# Altium PCB PCB.PcbDoc
Units mil, origin at the board's own origin, x right, y up, seen from the top; angles counter-clockwise.
Board outline 6000 x 4000 mil, 2 copper layers (Top Layer, Bottom Layer); 8 components, 3 nets, 32 pads, 0 vias.
Unrouted connection lines stored in the file: 14.
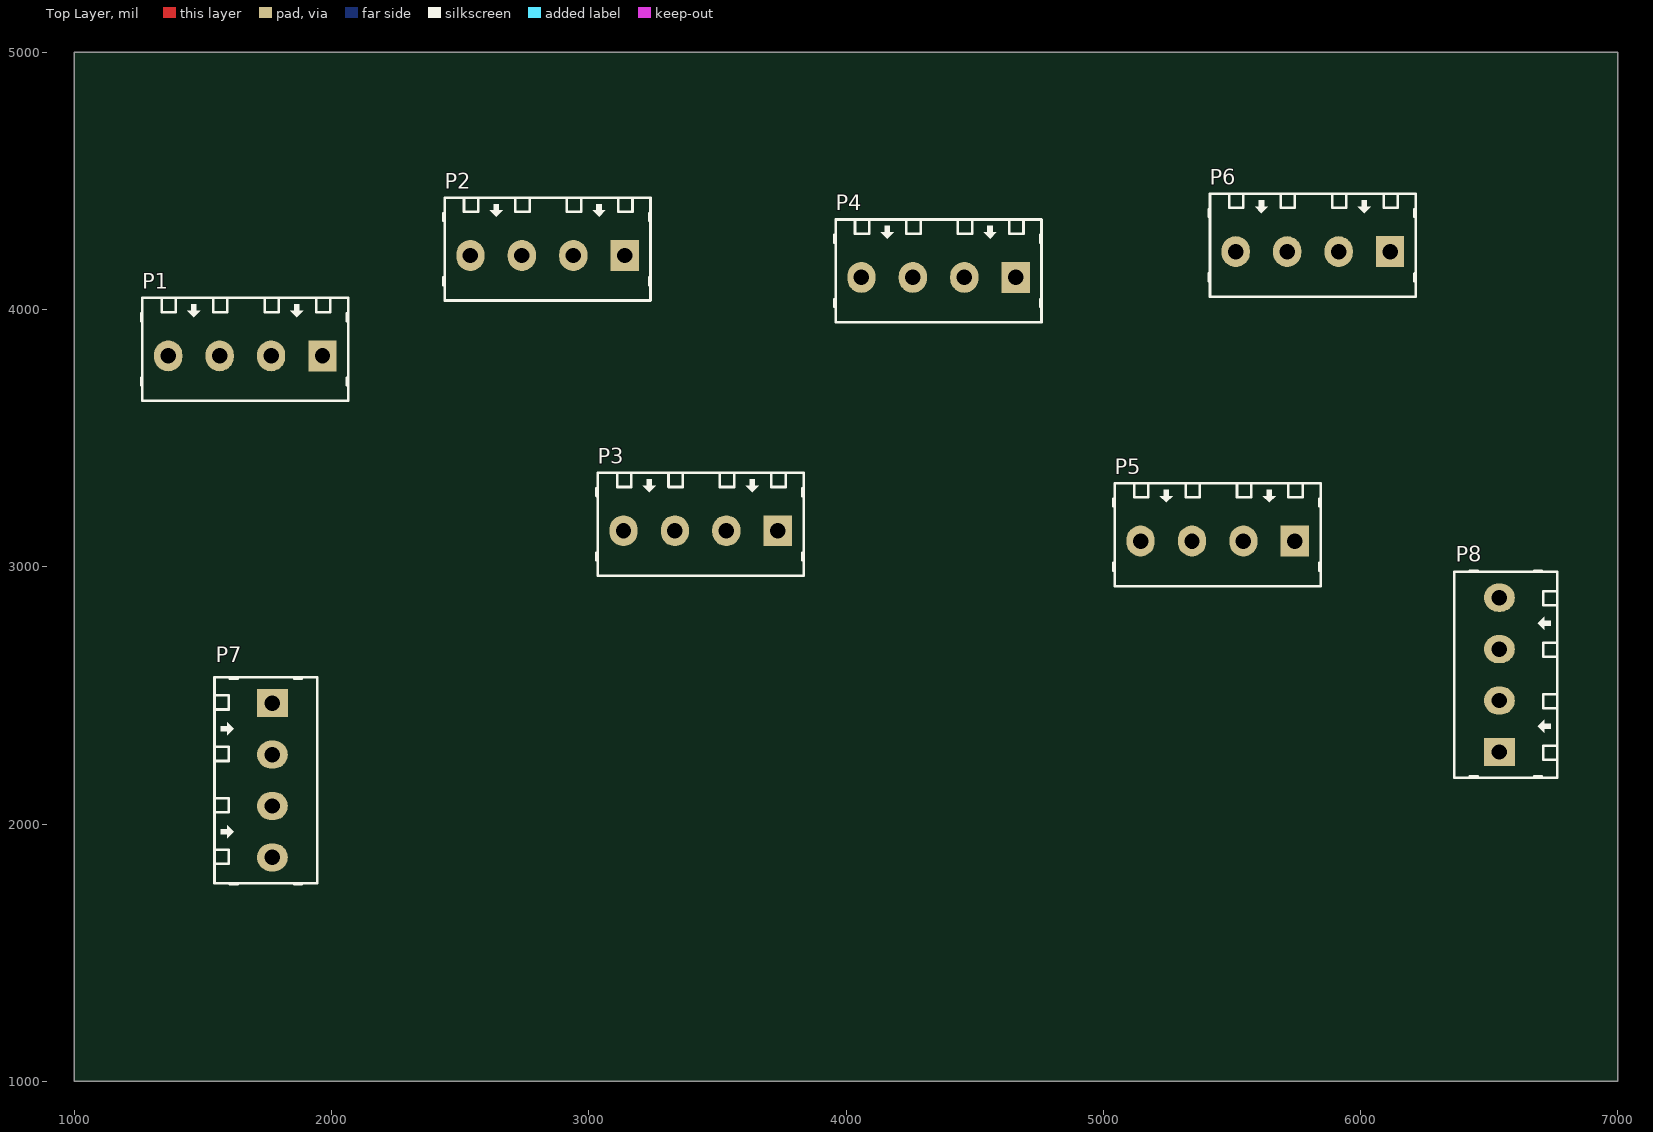
[diagram p0: Top Layer view]
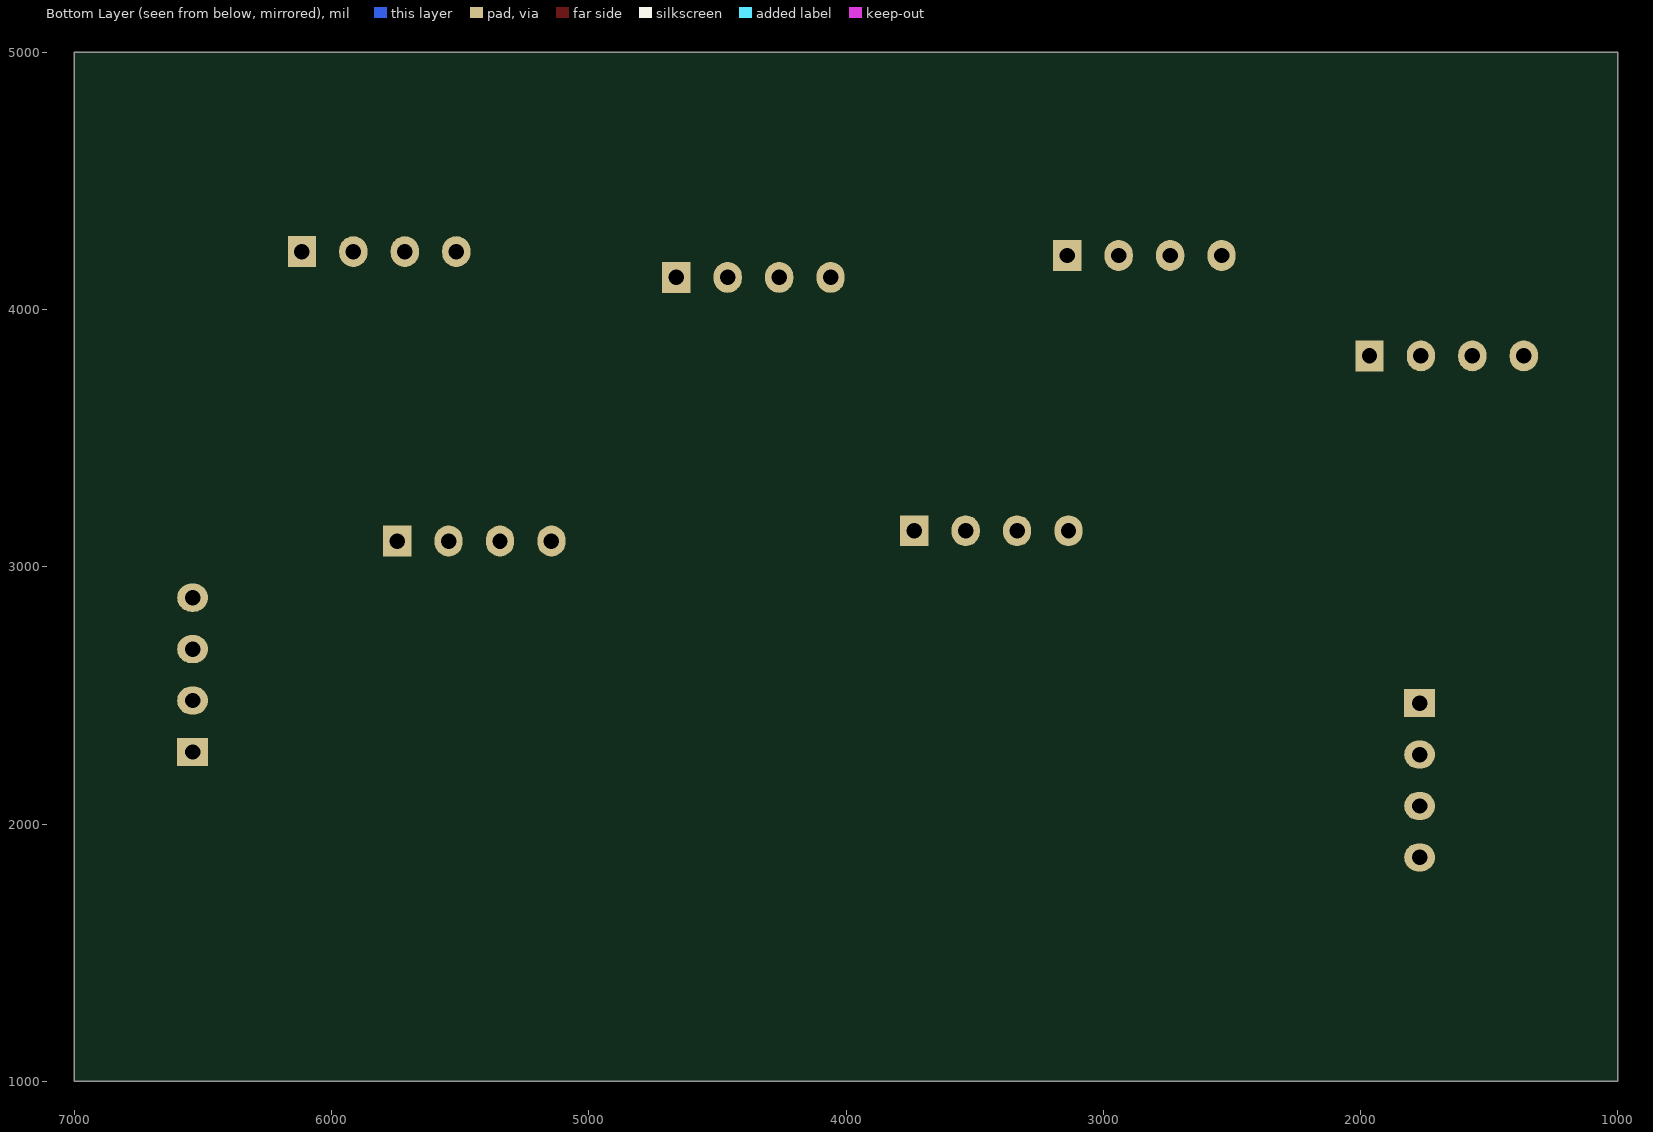
[diagram p1: Bottom Layer view, seen from below]

## Layer stack, top to bottom
Top Solder: solder mask 0.4, Solder Resist, Dk 3.5
Top Layer: signal copper 1.4
Dielectric 1: dielectric 12.6, FR-4, Dk 4.8
Bottom Layer: signal copper 1.4
Bottom Solder: solder mask 0.4, Solder Resist, Dk 3.5

## Board outline
1000,1000 7000,1000 7000,5000 1000,5000

## Design rules (kind name [scope] priority, off if disabled: settings)
Clearance [All] p1: gap=787.4 ignorepadtopadclearanceinfootprint=FALSE
PolygonConnect [All] p1: connectstyle=Relief reliefconductorwidth=10 reliefentries=4 polygonreliefangle="90 Angle" airgapwidth=10
RoutingVias [All] p1: holewidth=28 width=50 viastyle="Through Hole" minholewidth=28 minwidth=50 maxholewidth=28 maxwidth=50
SolderMaskExpansion [All] p1: expansion=4 istentingtop=FALSE
Width [All] p1: maxlimit=100 minlimit=10 preferedwidth=40 toplayer_minwidth=20 minimp=50.000000 maximp=50.000000 favimp=50.000000
30 further rules are at their usual default settings.

## Components (designator, comment, footprint, x,y, rotation, side; value= is the part's Value field where it differs from the comment)
P1 "Header 4" HDR/Terminal/4 1665,3820 r180 top
P2 "Header 4" HDR/Terminal/4 2840,4210 r180 top
P3 "Header 4" HDR/Terminal/4 3435,3140 r180 top
P4 "Header 4" HDR/Terminal/4 4360,4125 r180 top
P5 "Header 4" HDR/Terminal/4 5445,3100 r180 top
P6 "Header 4" HDR/Terminal/4 5815,4225 r180 top
P7 "Header 4" HDR/Terminal/4 1770,2170 r270 top
P8 "Header 4" HDR/Terminal/4 6540,2580 r90 top

## Footprints (in the part's own frame and the unit in brackets; to place one, negate y for a bottom-side part, rotate by r counter-clockwise, add the part's x,y. Pads: shape width x height; smd on the part's side, far side on the other; paste and mask are expansions set on the pad)
HDR/Terminal/4 [mil]
  rect 110x120 hole 60: 1(-300,0)
  oval 110x120 hole 60: 2(-100,0) 3(100,0) 4(300,0)
  silkscreen extent -400,-225 405,175, body extent -429,-218 400,168, height 559

## Part data
P1 P2 P3 P4 P5 P6 P7 P8: "Header, 4-Pin"

## Nets (pads, with @x,y where several pads share a name; then routed paths per layer and width w, separated by ;. In a path a pad name is that pad's centre, name@x,y a point inside that pad or via, vN(x,y) a via of type N, cw(c..) or ccw(c..) an arc to the next point about the centre after c; other vN are vias at no path point)
GND: P1.2 P2.2 P3.2 P4.2 P5.2 P6.2 P7.2 P8.2
NetLabel1: P7.3
VCC: P1.1 P2.1 P3.1 P4.1 P5.1 P6.1 P7.1 P8.1
pads on no net: P1.3 P1.4 P2.3 P2.4 P3.3 P3.4 P4.3 P4.4 P5.3 P5.4 P6.3 P6.4 P7.4 P8.3 P8.4

## Keep-outs
Bottom Layer:
  lines w10: 99999,0 99999,795